# EAGLE board 9ABreak (EAGLE 9.7.0)
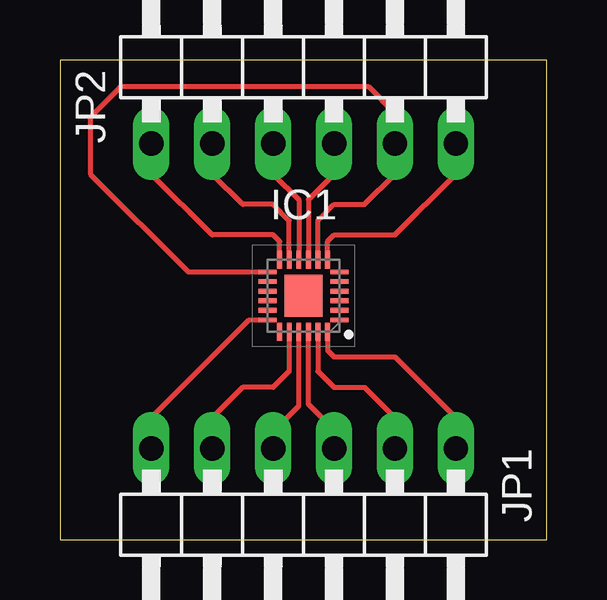
[diagram p0: board, top side]

Size 20.3 x 19.99 mm. Coordinates in mm from the lower left corner, seen from the top.
Outline: 0,0 20.3,0 20.3,19.99 0,19.99 0,0
Copper layers (1*16): Top / Bottom
Stack-up Default Layer Stack: Top User Defined 0.035mm / Dielectric-1 User Defined 1.5mm / Bottom User Defined 0.035mm
Design rules "default": minimum track width 6mil, minimum drill 0.35mm, track to track 6mil, track to pad 6mil, pad to pad 6mil, via to via 6mil, smd to smd 6mil, copper to edge 40mil, drill to drill 6mil, minimum pad ring 10mil, minimum via ring 8mil, stop-mask expansion 4mil, vias tented up to drill 0mil, thermal gap 10mil

## Footprints (pad centres in the part's own frame; a part is rotated, then mirrored left to right if it is on the bottom)
QFN40P300X300X105-25N = smd 0.75 x 0.2: 1 -1.5,1; 2 -1.5,0.6; 3 -1.5,0.2; 4 -1.5,-0.2; 5 -1.5,-0.6; 6 -1.5,-1; 13 1.5,-1; 14 1.5,-0.6; 15 1.5,-0.2; 16 1.5,0.2; 17 1.5,0.6; 18 1.5,1 | smd 0.2 x 0.75: 7 -1,-1.5; 8 -0.6,-1.5; 9 -0.2,-1.5; 10 0.2,-1.5; 11 0.6,-1.5; 12 1,-1.5; 19 1,1.5; 20 0.6,1.5; 21 0.2,1.5; 22 -0.2,1.5; 23 -0.6,1.5; 24 -1,1.5 | smd 1.59 x 1.75: 25 0,0
1X06/90 = drill 1.016 long: 1 -6.35,-3.81; 2 -3.81,-3.81; 3 -1.27,-3.81; 4 1.27,-3.81; 5 3.81,-3.81; 6 6.35,-3.81

## Placement (x,y rotation side)
IC1  ICM-20948  [QFN40P300X300X105-25N]  10.16,10.16 180 top
JP1  [1X06/90]  10.16,0 180 top
JP2  [1X06/90]  10.16,20.32 0 top

## Library data of the parts
IC1 = ICM-20948; ARROW_PART_NUMBER: ICM-20948; ARROW_PRICE-STOCK: https://www.arrow.com/en/products/icm-20948/invensense?region=nac; DESCRIPTION: IMUs - Inertial Measurement Units World's Lowest Power 9-Axis MEMS MotionTracking Device; HEIGHT: 1.05mm; MANUFACTURER_NAME: TDK; MANUFACTURER_PART_NUMBER: ICM-20948; MOUSER_PART_NUMBER: 410-ICM-20948; MOUSER_PRICE-STOCK: https://www.mouser.co.uk/ProductDetail/TDK-InvenSense/ICM-20948?qs=u4fy%2FsgLU9OtGc31yF%2Friw%3D%3D
JP1 JP2 = pinhead

## Nets
N$1: IC1.7 JP2.6
N$2: IC1.8 IC1.13 JP2.5
N$3: IC1.9 JP2.4
N$4: IC1.10 JP2.3
N$5: IC1.11 JP2.2
N$6: IC1.12 JP2.1
N$7: IC1.24 JP1.1
N$8: IC1.23 JP1.2
N$9: IC1.22 JP1.3
N$10: IC1.21 JP1.4
N$11: IC1.20 JP1.5
N$12: IC1.18 JP1.6

## Tracks (layer width: path | path; a pad name or v marks a point on that pad's centre or on a via)
N$1
  Top 0.203: IC1.7 11.16,12.43 11.43,12.7 13.97,12.7 16.51,15.24 JP2.6
N$2
  Top 0.203: IC1.8 10.76,13.3 11.43,13.97 12.7,13.97 13.97,15.24 JP2.5 13.97,17.78 12.88,18.87 2.54,18.87 1.27,17.6 1.27,15.24 5.35,11.16 IC1.13
N$3
  Top 0.203: IC1.9 10.36,14.17 11.43,15.24 JP2.4
N$4
  Top 0.203: IC1.10 9.96,14.17 8.89,15.24 JP2.3
N$5
  Top 0.203: IC1.11 9.56,13.3 8.89,13.97 7.62,13.97 6.35,15.24 JP2.2
N$6
  Top 0.203: JP2.1 3.81,15.24 6.35,12.7 8.89,12.7 9.16,12.43 IC1.12
N$7
  Top 0.203: IC1.24 11.16,7.89 11.43,7.62 13.97,7.62 16.51,5.08 JP1.1
N$8
  Top 0.203: IC1.23 10.76,7.02 11.43,6.35 12.7,6.35 13.97,5.08 JP1.2
N$9
  Top 0.203: JP1.3 11.43,4.58 10.36,5.65 IC1.22
N$10
  Top 0.203: JP1.4 8.89,4.51 9.96,5.58 IC1.21
N$11
  Top 0.203: IC1.20 9.56,7.02 8.89,6.35 7.62,6.35 6.35,5.08 JP1.5
N$12
  Top 0.203: JP1.6 3.81,5.08 7.89,9.16 IC1.18